# Altium PCB Module_Type_B.PcbDoc
Units mm, origin at the board's own origin, x right, y up, seen from the top; angles counter-clockwise.
Board outline 50 x 50 mm, 2 copper layers (Top Layer, Bottom Layer), stack 0.98 mm thick; 1 components, 27 nets, 68 pads, 0 vias.
Unrouted connection lines stored in the file: 4.
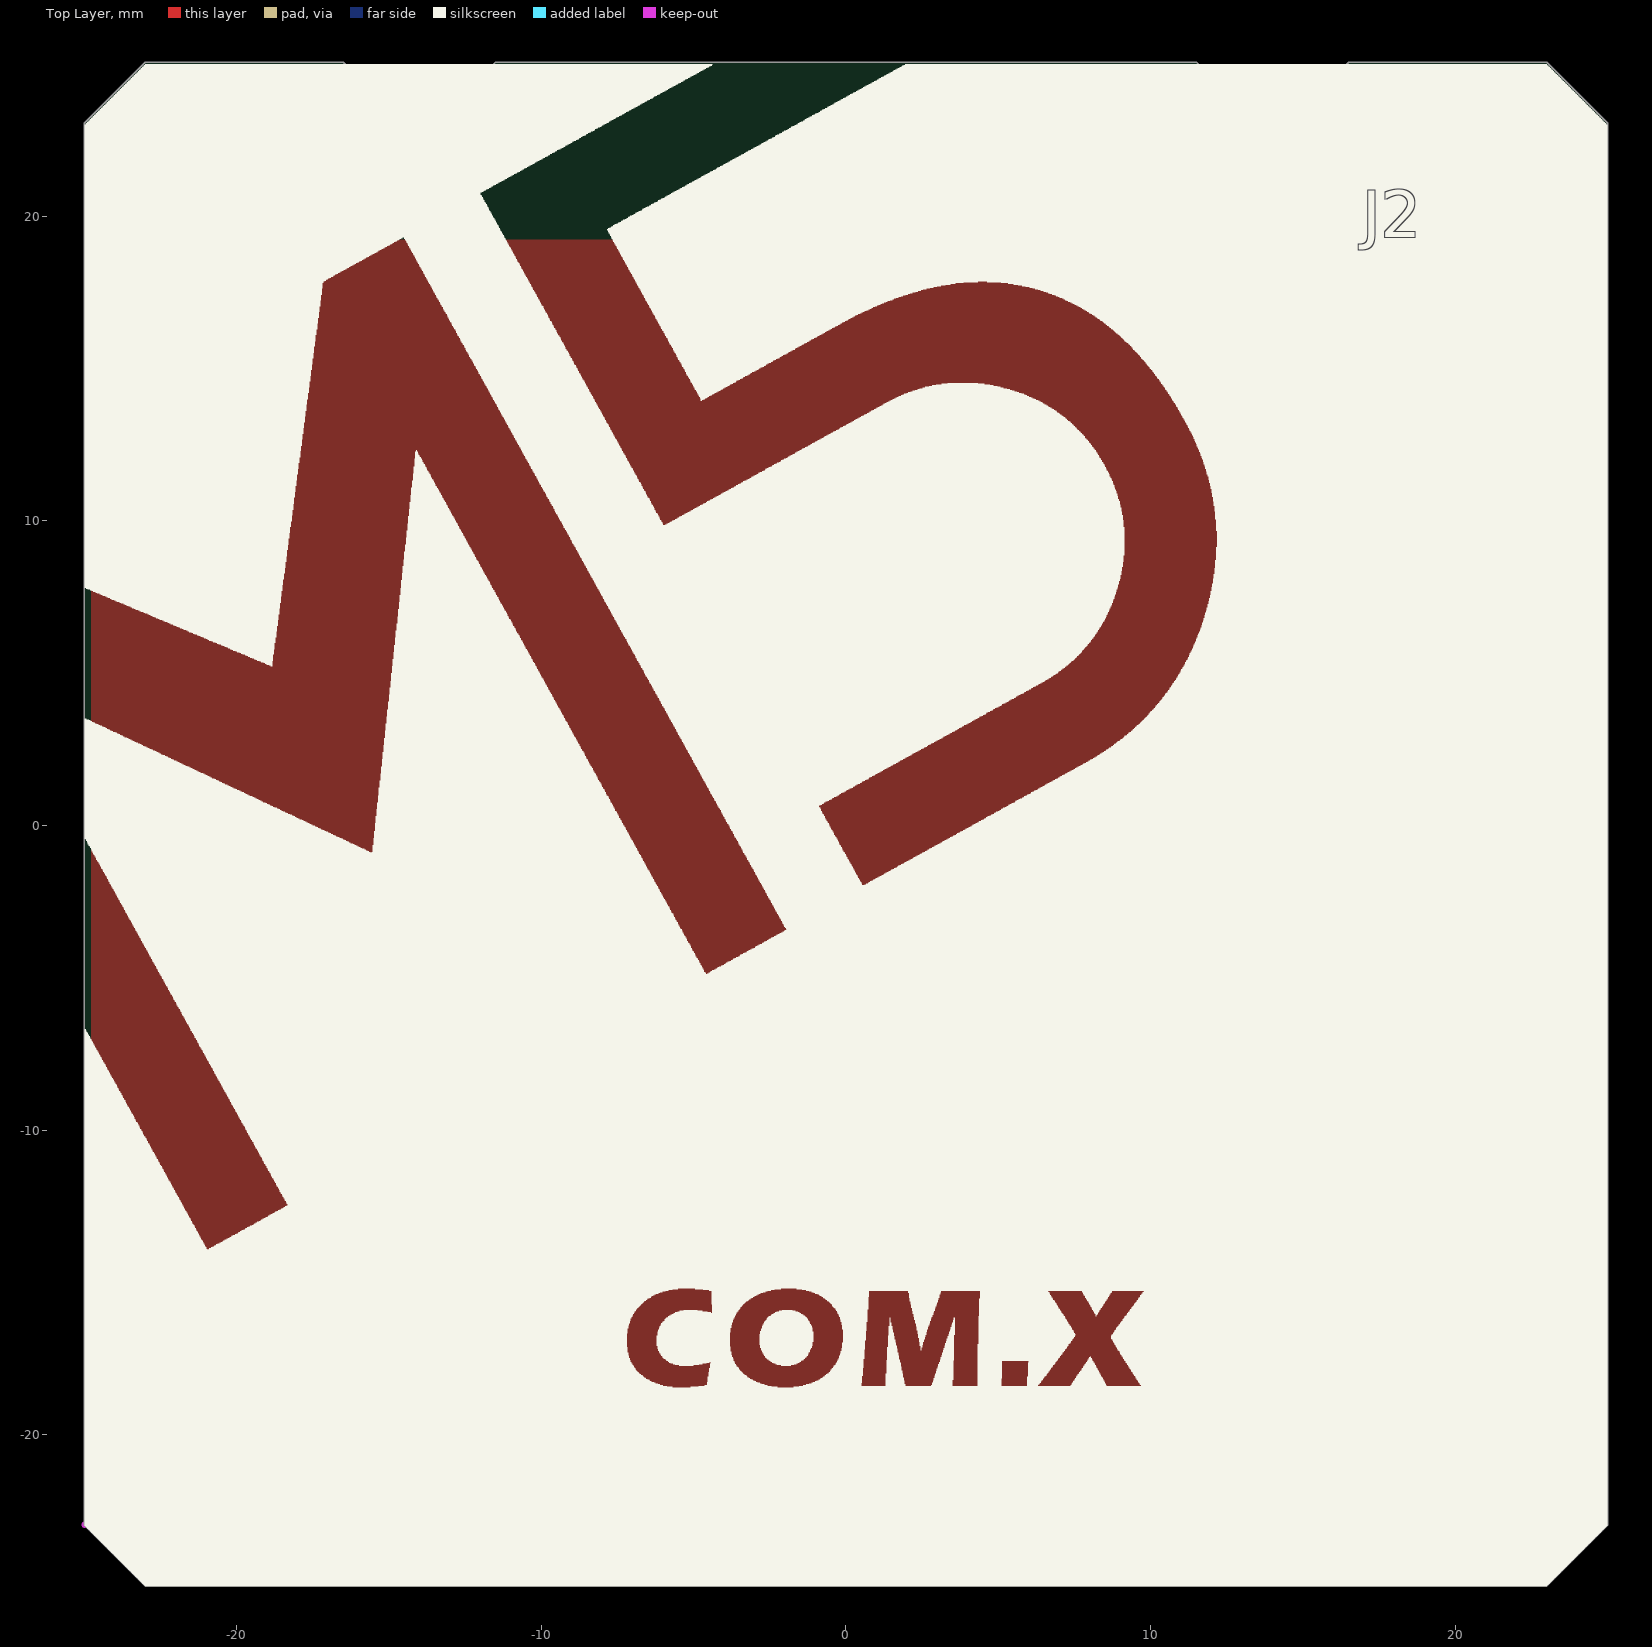
[diagram p0: Top Layer view]
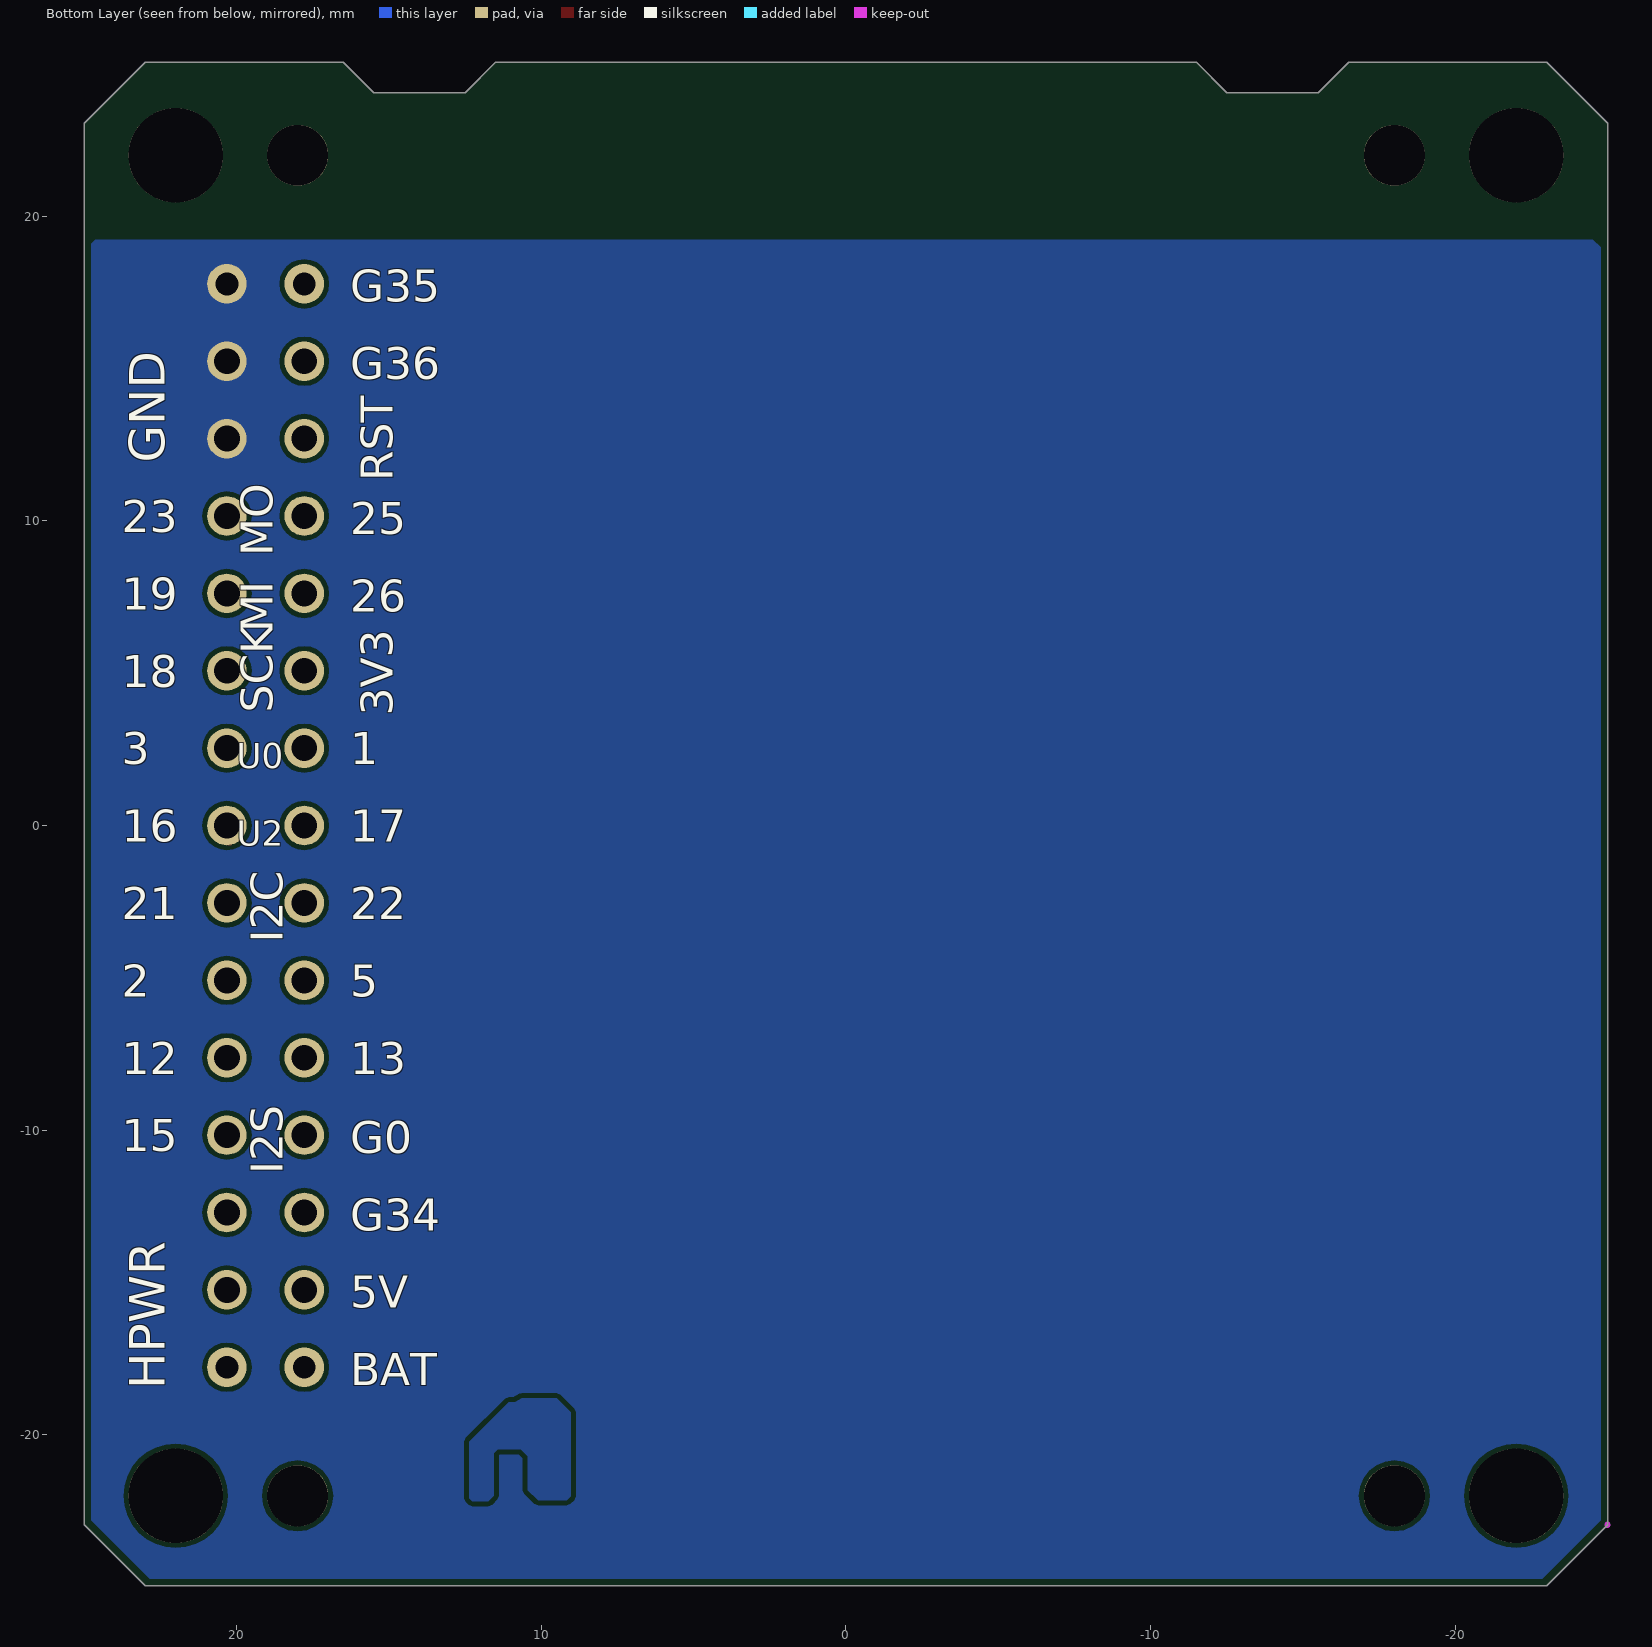
[diagram p1: Bottom Layer view, seen from below]

## Layer stack, top to bottom
Top Solder: solder mask 0.0102, Solder Resist, Dk 3.5
Top Layer: signal copper 0.0356
Dielectric1: dielectric 0.9086, FR-4, Dk 4.8
Bottom Layer: signal copper 0.0356
Bottom Solder: solder mask 0.0102, Solder Resist, Dk 3.5

## Board outline
-25,-22.949 -23,-24.949 23,-24.949 25,-22.949 25,23.051 23,25.051 16.5,25.051 15.5,24.051 12.5,24.051 11.5,25.051 8.25,25.051 -2.5,25.051 -11.5,25.051 -12.5,24.051 -15.5,24.051 -16.5,25.051 -23,25.051 -25,23.051

## Design rules (kind name [scope] priority, off if disabled: settings)
Clearance [All] p1: gap=0.152 ignorepadtopadclearanceinfootprint=FALSE except(0: Arc-Hole Track-Hole SMDPad-Hole THPad-Hole Via-Hole Fill-Hole Poly-Hole Region-Hole Text-Hole)
PlaneConnect [All] p1: planeconnectstyle=Direct reliefexpansion=0.508 reliefentries=4 reliefconductorwidth=0.254 reliefairgap=0.254
PolygonConnect [All] p1: connectstyle=Direct reliefconductorwidth=0.254 reliefentries=4 polygonreliefangle="90 Angle" airgapwidth=0.254
RoomDefinition Power [InComponentClass('Power')] p1: confinementstyle=ConfineIn formatcopy=TRUE lockcomponents=FALSE outline -97.942,-75.108 -47.142,-75.108 -47.142,-49.708 -97.942,-49.708
RoutingVias [All] p1: holewidth=0.3 width=0.6 viastyle="Through Hole" minholewidth=0.2 minwidth=0.5 maxholewidth=0.3 maxwidth=0.6
SolderMaskExpansion [All] p1: expansion=0.102 istentingtop=FALSE
Width [InNet('No Net')] p1: maxlimit=0.635 minlimit=0.152 preferedwidth=0.381 minimp=50.000000 maximp=50.000000 favimp=50.000000
29 further rules are at their usual default settings.

## Components (designator, comment, footprint, x,y, rotation, side; value= is the part's Value field where it differs from the comment)
J2 "M5Stack_BUS" H-2X15P 17.78,17.78 r0 top locked

## Footprints (in the part's own frame and the unit in brackets; to place one, negate y for a bottom-side part, rotate by r counter-clockwise, add the part's x,y. Pads: shape width x height; smd on the part's side, far side on the other; paste and mask are expansions set on the pad)
H-2X15P [mm]
  round 1.3 hole 0.75: 1(2.54,0) 2(0,0) 29(2.54,-35.56) 30(0,-35.56)
  rect 1x1.3 smd: 1(3.02,0) 2(-0.48,0) 3(3.02,-2.54) 4(-0.48,-2.54) 5(3.02,-5.08) 6(-0.48,-5.08) 7(3.02,-7.62) 8(-0.48,-7.62) 9(3.02,-10.16) 10(-0.48,-10.16) 11(3.02,-12.7) 12(-0.48,-12.7) 13(3.02,-15.24) 14(-0.48,-15.24) 15(3.02,-17.78) 16(-0.48,-17.78) 17(3.02,-20.32) 18(-0.48,-20.32) 19(3.02,-22.86) 20(-0.48,-22.86) 21(3.02,-25.4) 22(-0.48,-25.4) 23(3.02,-27.94) 24(-0.48,-27.94) 25(3.02,-30.48) 26(-0.48,-30.48) 27(3.02,-33.02) 28(-0.48,-33.02) 29(3.02,-35.56) 30(-0.48,-35.56)
  round 1.3 hole 0.85: 3(2.54,-2.54) 4(0,-2.54) 5(2.54,-5.08) 6(0,-5.08) 7(2.54,-7.62) 8(0,-7.62) 9(2.54,-10.16) 10(0,-10.16) 11(2.54,-12.7) 12(0,-12.7) 13(2.54,-15.24) 14(0,-15.24) 15(2.54,-17.78) 16(0,-17.78) 17(2.54,-20.32) 18(0,-20.32) 19(2.54,-22.86) 20(0,-22.86) 21(2.54,-25.4) 22(0,-25.4) 23(2.54,-27.94) 24(0,-27.94) 25(2.54,-30.48) 26(0,-30.48) 27(2.54,-33.02) 28(0,-33.02)
  Top Layer lines w0.2: 2.456,-18.344 2.78,-18.02 3.02,-17.78

## Free pads (board coordinates)
  round 3.1 hole 3.1: 0(-22,-22) 0(-22,22) 0(22,-22) 0(22,22)
  round 2 hole 2: 0(-18,-22) 0(-18,22) 0(18,-22) 0(18,22)

## Nets (pads, with @x,y where several pads share a name; then routed paths per layer and width w, separated by ;. In a path a pad name is that pad's centre, name@x,y a point inside that pad or via, vN(x,y) a via of type N, cw(c..) or ccw(c..) an arc to the next point about the centre after c; other vN are vias at no path point)
+3.3V: J2.12
+5.4V: 
+12V: 
EN: J2.6
G0: J2.24
G5: J2.20
G13: J2.22
G15: J2.23
G16: J2.15
G17: J2.16
G25: J2.8
G26: J2.10
GND: J2.1 J2.3 J2.5
IN+: 
MIC: 
NetC1_1: 
NetC1_2: 
NetD1_2: J2.28
NetP1_1: 
NetP3_3: 
NetQ1_1: 
NetR1_2: 
NetR2_1: 
NetR4_1: 
O+: 
RXD: 
TXD: 
pads on no net: J2.2 J2.4 J2.7 J2.9 J2.11 J2.13 J2.14 J2.17 J2.18 J2.19 J2.21 J2.25 J2.26 J2.27 J2.29 J2.30

## Polygon pours and split planes (outlines as drawn)
GND on Bottom Layer "Top Layer-No Net" (solid, pour order 6): -22.86,-24.714 -24.765,-22.809 -24.765,18.974 -24.511,19.228 24.638,19.228 24.765,19.101 24.765,-22.809 22.86,-24.714
no net on Bottom Layer "Top Layer-No Net" (solid, pour order 4): 10.643,-18.796 9.5,-18.796 9.042,-19.253 9.042,-22.022 9.169,-22.149 10.109,-22.149 10.439,-21.818 10.439,-20.701 10.668,-20.472 11.43,-20.472 11.557,-20.599 11.557,-21.996 11.735,-22.174 12.268,-22.174 12.37,-22.072 12.37,-20.218 11.074,-18.923 10.871,-18.923
GND on Top Layer "Top Layer-No Net" (solid, pour order 8): -22.86,-24.714 -24.765,-22.809 -24.765,18.974 -24.511,19.228 24.638,19.228 24.765,19.101 24.765,-22.809 22.86,-24.714

## Keep-outs
Keep-Out Layer:
  lines w0.2: -25,-22.949 -25,-22.949

## Silkscreen, mask and mechanical layers (free items; w line width, h text height)
Top Overlay:
  drawing of 5995 lines, arcs and shapes, not listed
Mechanical 1:
  lines w0.1: -23,25 -16.5,25 ; 23,25 16.5,25 15.5,24 12.5,24 11.5,25 8.25,25 ; -16.5,25 -15.5,24 -12.5,24 -11.5,25 -2.5,25 8.25,25 ; -16.5,25 -16.5,25 ; 8.25,25 8.25,25
  lines w0.127: -23,25 -25,23 -25,-23 -23,-25 23,-25 25,-23 25,23 23,25

## Text inside footprints (layer, text, board x,y; h text height)
J2: Bottom Overlay "1" at 16.277,1.66 h1.8; Bottom Overlay "17" at 16.277,-0.88 h1.8; Bottom Overlay "22" at 16.277,-3.42 h1.8; Bottom Overlay "5" at 16.277,-5.96 h1.8; Bottom Overlay "13" at 16.277,-8.5 h1.8; Bottom Overlay "G34" at 16.277,-13.64 h1.8; Bottom Overlay "G0" at 16.277,-11.1 h1.8; Bottom Overlay "U2" at 20,-0.94 h1.4; Bottom Overlay "BAT" at 16.277,-18.72 h1.8; Bottom Overlay "MO" at 18.475,8.84 h1.8 r270; Bottom Overlay "MI" at 18.475,6.34 h1.8 r270; Bottom Overlay "I2C" at 18.15,-3.85 h1.8 r270; Bottom Overlay "2" at 23.765,-5.96 h1.8; Bottom Overlay "HPWR" at 21.965,-18.5 h2 r270; Bottom Overlay "I2S" at 18.15,-11.45 h1.8 r270; Bottom Overlay "U0" at 20,1.6 h1.4; Bottom Overlay "3" at 23.765,1.66 h1.8; Bottom Overlay "18" at 23.765,4.2 h1.8; Bottom Overlay "15" at 23.765,-11.04 h1.8; Bottom Overlay "19" at 23.765,6.74 h1.8; Bottom Overlay "GND" at 21.965,11.9 h2 r270; Bottom Overlay "16" at 23.765,-0.88 h1.8; Bottom Overlay "12" at 23.765,-8.5 h1.8; Bottom Overlay "23" at 23.765,9.28 h1.8; Bottom Overlay "21" at 23.765,-3.42 h1.8; Bottom Overlay "SCK" at 18.475,3.7 h1.8 r270; Bottom Overlay "5V" at 16.277,-16.18 h1.8; Bottom Overlay "3V3" at 14.535,3.6 h1.8 r270; Bottom Overlay "26" at 16.277,6.68 h1.8; Bottom Overlay "25" at 16.277,9.22 h1.8; Bottom Overlay "RST" at 14.535,11.3 h1.8 r270; Bottom Overlay "G36" at 16.277,14.3 h1.8; Bottom Overlay "G35" at 16.277,16.84 h1.8